# EAGLE board esp (EAGLE 9.6.2)
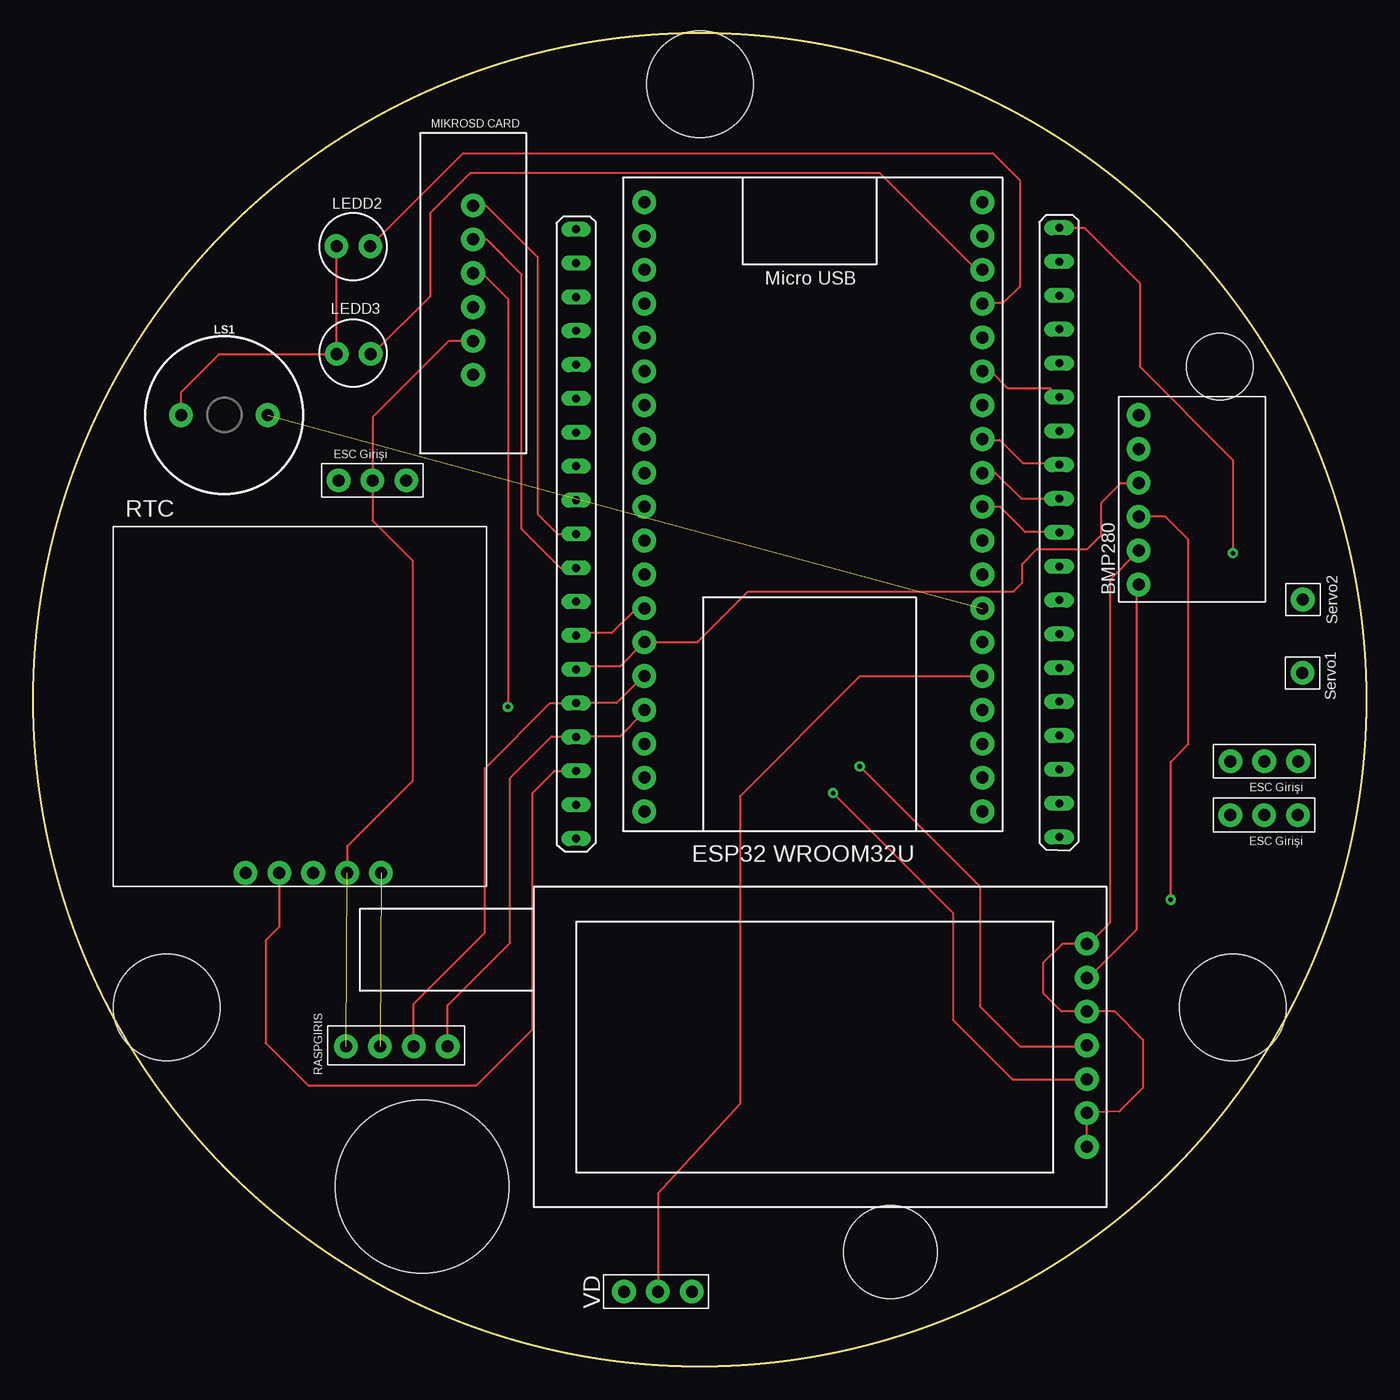
[diagram p0: board, top side]
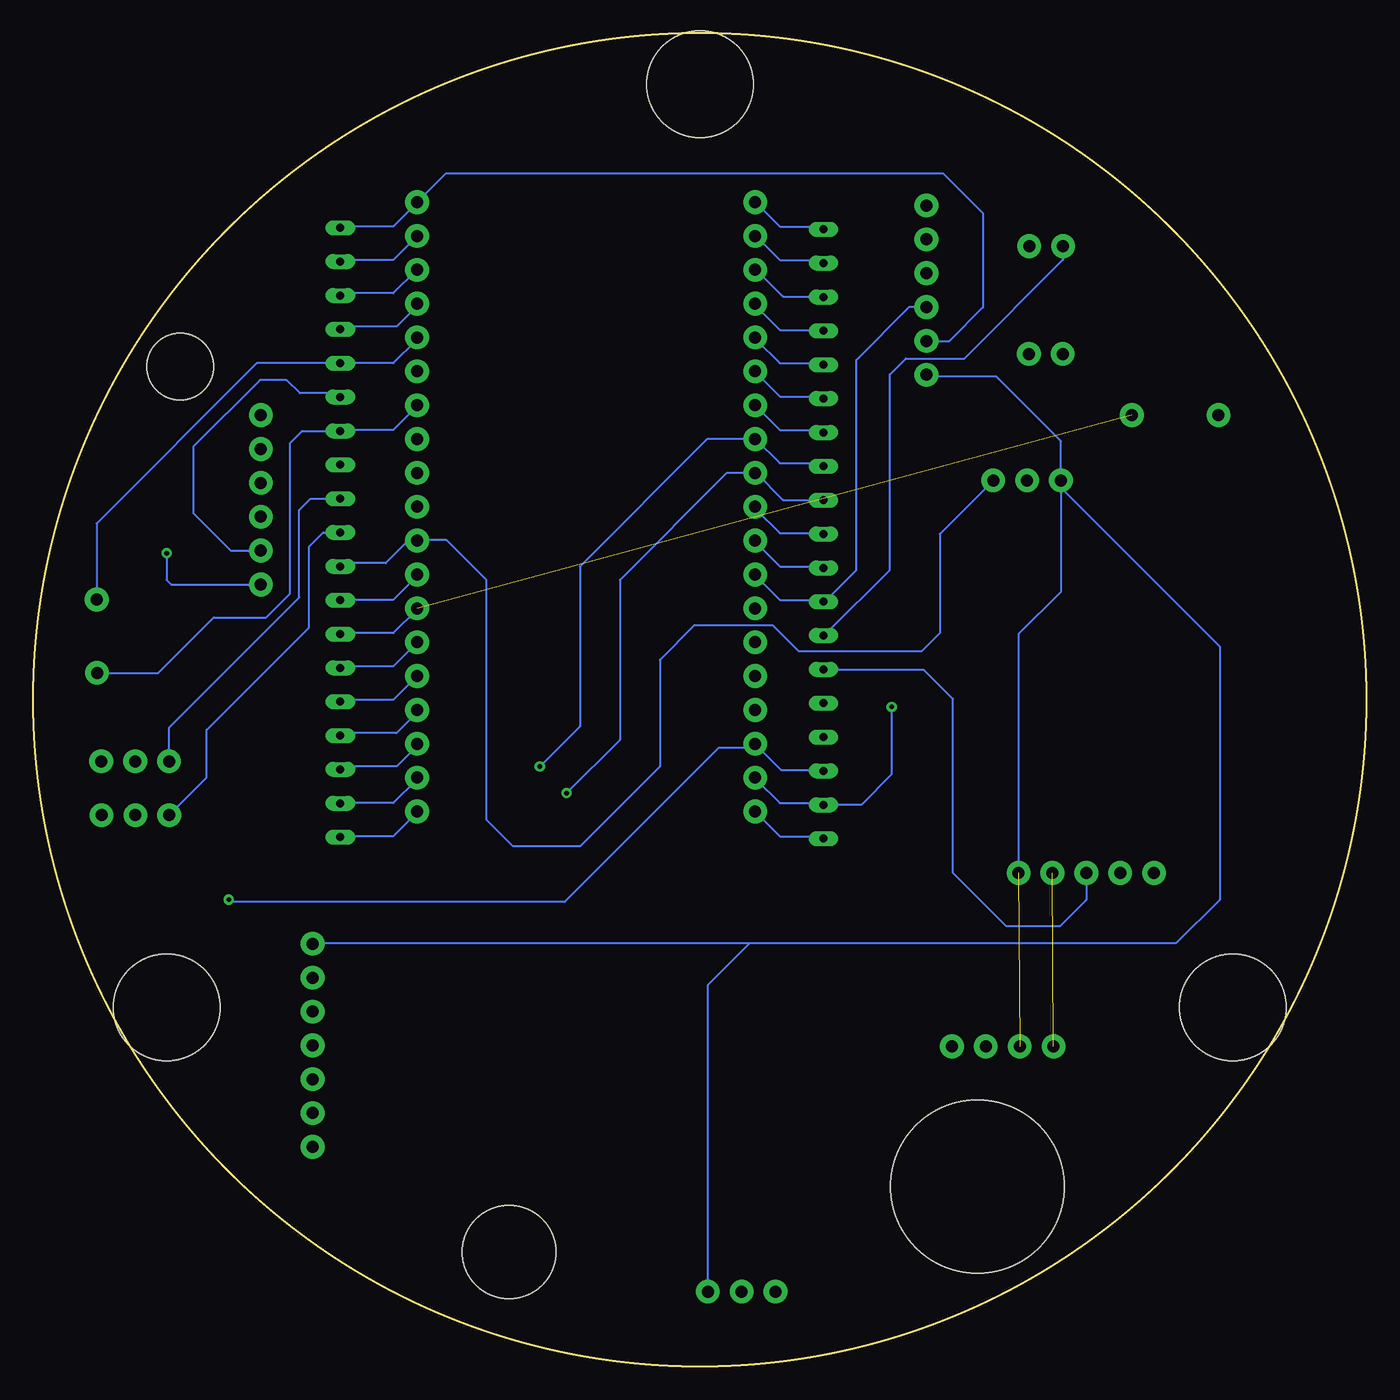
[diagram p1: board, bottom side, seen from below]

Size 100 x 100 mm. Coordinates in mm from the lower left corner, seen from the top.
Outline: circle at 50,50 radius 50
Copper layers (1*16): Top 0.035mm / dielectric 1.5mm / Bottom 0.035mm
Design rules "default": minimum track width 6mil, minimum drill 0.35mm, track to track 6mil, track to pad 6mil, pad to pad 6mil, via to via 6mil, smd to smd 6mil, copper to edge 40mil, drill to drill 6mil, minimum pad ring 10mil, minimum via ring 8mil, stop-mask expansion 4mil, vias tented up to drill 0mil, thermal gap 10mil
Holes 8 mm at 50,96.17 89.98,26.92 10.02,26.92
Holes 13 mm at 29.17,13.48
Holes 5 mm at 89,75
Holes 7 mm at 64.31,8.55

## Footprints (pad centres in the part's own frame; a part is rotated, then mirrored left to right if it is on the bottom)
BMP280 = drill 0.9 pad 1.778: CSB 3.81,3.81; GND -3.81,3.81; SCL -1.27,3.81; SDA 1.27,3.81; SDD 6.35,3.81; VCC -6.35,3.81
BUZZER-12MM = drill 0.9 pad 1.778: + 3.25,0; - -3.25,0
TINYRTC = drill 0.9 pad 1.778: DS -5.08,0; GND 5.08,0; SCL -2.54,0; SDA 0,0; VCC 2.54,0
VOLTAGE_DIVIDER = drill 0.9 pad 1.778: PIN1 0,2.54; PIN2 0,0; PIN3 0,-2.54
RASPGIRIS = drill 0.9 pad 1.778: 5V 0,2.54; GND 0,0; RX 0,-5.08; TX 0,-2.54
ESP32WROOM32U = drill 0.9 pad 1.778: 0 27.9,-30.48; 2 27.9,-33.02; 3V3 2.54,2.54; 4 27.9,-27.94; 5 27.9,-20.32; 5V 2.54,-43.18; 12 2.54,-27.94; 13 2.54,-33.02; 14 2.54,-25.4; 15 27.9,-35.56; 16 27.9,-25.4; 17 27.9,-22.86; 18 27.9,-17.78; 19 27.9,-15.24; 21 27.9,-10.16; 22 27.9,-2.54; 23 27.9,0; 25 2.54,-17.78; 26 2.54,-20.32; 27 2.54,-22.86; 32 2.54,-12.7; 33 2.54,-15.24; 34 2.54,-7.62; 35 2.54,-10.16; CLK 27.9,-43.18; CMD 2.54,-40.64; D0 27.9,-40.64; D1 27.9,-38.1; D2 2.54,-35.56; D3 2.54,-38.1; EN 2.54,0; GND 2.54,-30.48; GND@2 27.9,2.54; GND@3 27.9,-12.7; RX 27.9,-7.62; TX 27.9,-5.08; VN 2.54,-5.08; VP 2.54,-2.54
LORAFULLSIZE = drill 0.9 pad 1.778: AUX -10.51,-3.67; GND -10.51,-8.75; M0 -10.51,6.49; M1 -10.51,3.95; RX -10.51,1.41; TX -10.51,-1.13; VCC -10.51,-6.21
MICROSD_CARD = drill 0.9 pad 1.778: CS 0,5.08; GND 0,-7.62; MISO 0,-2.54; MOSI 0,0; SCK 0,2.54; VCC 0,-5.08
SERVO_SIGNAL = drill 0.9 pad 1.778: SERVO 0,0
ESC_GIRIS = drill 0.9 pad 1.778: 5V 0,0; GND -2.54,0; PWM 2.54,0
ESPSAGPIN = drill 0.6 long: 0 0,0; 2 0,-2.54; 4 0,2.54; 5 0,10.16; 15 0,-5.08; 16 0,5.08; 17 0,7.62; 18 0,12.7; 19 0,15.24; 21 0,20.32; 22 0,27.94; 23 0,30.48; CLK 0,-12.7; D0 0,-10.16; D1 0,-7.62; GND@2 0,33.02; GND@3 0,17.78; RX 0,22.86; TX 0,25.4
ESPSOLPIN = drill 0.6 long: 3V3 0,38.1; 5V 0,-7.62; 12 0,7.62; 13 0,2.54; 14 0,10.16; 25 0,17.78; 26 0,15.24; 27 0,12.7; 32 0,22.86; 33 0,20.32; 34 0,27.94; 35 0,25.4; CMD 0,-5.08; D2 0,0; D3 0,-2.54; EN 0,35.56; GND@1 0,5.08; VN 0,30.48; VP 0,33.02
LED = drill 0.9 pad 1.778: + -2.54,0; - 0,0

## Placement (x,y rotation side)
BMP1  BMP280  [BMP280]  86.74,65 90 top
LS1  BUZZER-PTH  [BUZZER-12MM]  14.33,71.36 0 top
U$1  TINYRTC  [TINYRTC]  21,37 0 top
U$2  VOLTAGE_DIVIDER  [VOLTAGE_DIVIDER]  46.86,5.6 90 top
U$3  RASPGIRIS  [RASPGIRIS]  26,24 90 top
U$4  ESP32WROOM32U  [ESP32WROOM32U]  73.74,44.16 180 top
U$5  LORAFULLSIZE  [LORAFULLSIZE]  68.54,22.94 180 top
U$6  MICROSD_CARD  [MICROSD_CARD]  33,82 0 top
U$7  SERVO_SIGNAL  [SERVO_SIGNAL]  95.22,52.02 0 top
U$9  SERVO_SIGNAL  [SERVO_SIGNAL]  95.25,57.52 0 top
U$11  ESC_GIRIS  [ESC_GIRIS]  25.44,66.46 0 top
U$12  ESC_GIRIS  [ESC_GIRIS]  92.34,41.35 180 top
U$13  ESC_GIRIS  [ESC_GIRIS]  92.36,45.39 180 top
U$14  ESPSAGPIN  [ESPSAGPIN]  40.72,72.6 180 top
U$15  ESPSOLPIN  [ESPSOLPIN]  76.97,77.79 180 top
U$17  LED  [LED]  22.75,84.03 180 top
U$18  LED  [LED]  22.77,75.94 180 top

## Library data of the parts
BMP1 U$2 U$7 U$9 U$11-U$13 = SpatiumB
LS1 = SparkFun-Electromechanical; PROD_ID: COMP-08253; SF_SKU: COM-07950
U$1 U$3-U$6 U$14 U$15 U$17 U$18 = SpatMuy2022

## Nets
3GND: U$4.GND@2 U$14.GND@2
3V3: U$4.3V3 U$15.3V3
5: U$4.5 U$6.CS U$14.5
5GND: BMP1.GND U$1.GND U$2.PIN3 U$3.GND U$4.GND U$5.AUX U$5.GND U$5.M0 U$5.M1 U$6.GND U$11.GND U$15.GND@1
5V: BMP1.VCC U$1.VCC U$3.5V U$4.5V U$5.VCC U$6.VCC U$11.5V U$15.5V
12: U$4.12 U$7.SERVO U$15.12
13: U$4.13 U$9.SERVO U$15.13
16: U$4.16 U$5.TX U$14.16
17: U$4.17 U$5.RX U$14.17
18: U$4.18 U$6.SCK U$14.18
19: U$4.19 U$6.MISO U$14.19
21: BMP1.SDA U$1.SDA U$4.21 U$14.21
22: BMP1.SCL U$1.SCL U$4.22 U$14.22
23: U$4.23 U$6.MOSI U$14.23
25: U$4.25 U$11.PWM U$15.25
26: U$4.26 U$12.PWM U$15.26
27: U$4.27 U$13.PWM U$15.27
34: U$2.PIN2 U$4.34 U$15.34
BGND: LS1.- U$4.GND@3 U$14.GND@3 U$17.- U$18.-
BPWM: LS1.+ U$4.32 U$15.32
D2: U$4.D2 U$15.D2 U$17.+
D3: U$4.D3 U$15.D3 U$18.+
N$3: U$4.EN U$15.EN
N$4: U$4.VP U$15.VP
N$5: U$4.VN U$15.VN
N$7: U$4.35 U$15.35
N$9: U$4.33 U$15.33
N$13: U$4.14 U$15.14
N$19: U$4.CMD U$15.CMD
N$33: U$4.4 U$14.4
N$34: U$4.0 U$14.0
N$35: U$4.2 U$14.2
N$36: U$4.15 U$14.15
N$37: U$4.D1 U$14.D1
N$38: U$4.D0 U$14.D0
N$39: U$4.CLK U$14.CLK
RX: U$3.TX U$4.RX U$14.RX
TX: U$3.RX U$4.TX U$14.TX

## Tracks (layer width: path | path; a pad name or v marks a point on that pad's centre or on a via)
3GND
  Bottom 0.152: U$14.GND@2 40.75,39.75 44,39.75 45.75,41.5 U$4.GND@2
3V3
  Bottom 0.152: U$15.3V3 76.75,39.75 73,39.75 71.25,41.5 U$4.3V3
5
  Top 0.152: U$6.CS 33.97,87.08 37.83,83.21 37.83,64 37.83,63.97 37.83,63.93 39.32,62.44 U$14.5
  Bottom 0.152: U$14.5 40.75,62.5 44,62.5 45.75,64.25 U$4.5
5GND  (1 unrouted)
  Top 0.152: U$5.M0 79,16.5 79,18.75 U$5.M1 81.5,19.11 83.25,20.86 83.25,24.5 81.14,26.61 U$5.AUX 77.14,26.61 75.75,28 75.75,30.25 77.19,31.69 U$5.GND 79.25,31.75 80.75,33.25 80.75,59 82.75,61 BMP1.GND | U$4.GND 71.85,74.64 73.09,73.39 76.29,73.39 U$15.GND@1
  Bottom 0.152: 23,66.25 U$11.GND | U$11.GND 22.9,69.4 27.75,74.25 33,74.25 U$6.GND | 77,72.5 U$15.GND@1 77.26,73 80,73 81,74 83,74 88,69 88,64 85.19,61.19 BMP1.GND | 46.25,31.75 79,31.75 U$5.GND | 46.25,31.75 14.25,31.75 11,35 11,54 22.9,65.9 U$11.GND | U$2.PIN3 49.4,28.6 46.25,31.75 | U$11.GND 22.9,58.1 26.08,54.92 U$1.GND
5V  (via drill 0.35)  (1 unrouted)
  Top 0.152: U$1.VCC 23.54,39 28.44,43.9 28.44,60.46 25.44,63.46 U$11.5V 25.5,66.5 25.5,71.25 31.17,76.92 U$6.VCC | U$5.VCC 79.25,29.25 82.75,32.75 82.75,58.5 82.78,58.5 BMP1.VCC | 77,85.25 U$15.5V 78.86,85.41 83,81.27 83,75 90,68 v90,61
  Bottom 0.152: U$15.5V 76.75,85.5 73,85.5 71.25,87.25 U$4.5V 69.04,89.5 31.75,89.5 28.75,86.5 28.75,79.45 31.28,76.92 U$6.VCC | v90,61 90,59 89.65,58.65 BMP1.VCC
12
  Bottom 0.152: U$4.12 71.25,72 73,70.25 76.75,70.25 U$15.12 79.83,70.17 80.74,69.26 80.74,57.97 82.53,56.19 86.45,56.19 90.62,52.02 U$7.SERVO
13
  Bottom 0.152: U$4.13 71.25,77 73,75.25 U$15.13 83.23,75.25 95.25,63.23 95.25,57.75 U$9.SERVO
16  (via drill 0.35)
  Top 0.152: v62,45 71,36 71,27 74,24 78.98,24 U$5.TX
  Bottom 0.152: U$14.16 40.75,67.75 44,67.75 45.75,69.5 U$4.16 49.44,69.56 59,60 59,48 v62,45
17  (via drill 0.35)
  Top 0.152: v60,43 69,34 69,26 73.47,21.53 U$5.RX
  Bottom 0.152: U$14.17 40.75,65 43.75,65 45.75,67 U$4.17 47.98,67.02 56,59 56,47 v60,43
18
  Top 0.152: U$6.SCK 34,84.54 36.64,81.9 36.64,62.81 39.55,59.9 U$14.18
  Bottom 0.152: U$14.18 40.75,60 44,60 45.75,61.75 U$4.18
19
  Bottom 0.152: U$4.19 45.75,59.25 44,57.5 40.75,57.5 U$14.19 40.5,57.5 38.25,59.75 38.25,75.5 34.29,79.46 U$6.MISO
21
  Top 0.152: U$14.21 40.75,52.5 44,52.5 45.75,54.25 U$4.21 | 46,54.5 U$4.21 | U$4.21 49.84,54.32 53.64,58.12 73.53,58.12 74.2,58.78 74.2,60.2 75.31,61.31 79.08,61.31 80.11,62.34 80.11,64.79 81.6,66.27 BMP1.SDA
  Bottom 0.152: U$14.21 40.5,52.25 33.19,52.25 31,50.06 31,37 27,33 23,33 21,35 U$1.SDA
22  (via drill 0.35)
  Top 0.152: v85.34,35 85.34,45.34 86.67,46.67 86.67,62.01 84.94,63.73 BMP1.SCL | U$1.SCL 18.46,32.97 17.43,31.94 17.43,24.25 20.6,21.07 33.24,21.07 37.45,25.28 37.45,43 39.1,44.66 U$14.22
  Bottom 0.152: U$14.22 40.75,44.75 43.89,44.75 U$4.22 46.13,46.41 48.55,46.41 60.13,34.82 85.34,34.82 v85.34,35
23  (via drill 0.35)
  Top 0.152: U$6.MOSI 33.67,82 35.6,80.07 v35.6,49.46
  Bottom 0.152: U$4.23 45.75,44 44,42.25 40.75,42.25 U$14.23 37.88,42.12 35.6,44.4 v35.6,49.46
25
  Bottom 0.152: U$15.25 76.75,60.25 73.56,60.25 71.88,61.94 U$4.25 71.14,62 69,62 66,59 66,41 64,39 59,39 53,45 53,53 50.42,55.58 44.51,55.58 42.55,53.62 33.38,53.62 32,55 32,62.45 U$11.PWM
26
  Top 0.152: U$4.26 72.51,64.48 74.42,62.57 76.95,62.57 U$15.26
  Bottom 0.152: U$12.PWM 87,44.15 87,47.74 79.31,55.42 79.31,61.49 78.25,62.55 U$15.26
27
  Top 0.152: 71.25,67 U$4.27 72.2,67.02 74.13,65.09 U$15.27
  Bottom 0.152: U$13.PWM 89.82,47.91 80.05,57.68 80.05,64.23 79.19,65.09 U$15.27
34
  Top 0.152: U$2.PIN2 46.86,12.97 53,19.68 53,42.75 62.03,51.78 U$4.34
  Bottom 0.152: U$15.34 76.75,50 73,50 71.25,51.75 U$4.34
BGND
  Top 0.152: U$17.- 22.75,84 22.75,76 U$18.- 13.94,75.94 11.08,73.08 LS1.- | U$4.GND@3 45.24,56.86 43.39,55 40.75,55 U$14.GND@3
  Bottom 0.152: U$17.- 22.75,83 30.14,75.61 34.54,75.61 35.75,74.4 35.75,59.75 40.5,55 U$14.GND@3
BPWM  (1 unrouted)
  Bottom 0.152: U$15.32 76.75,55 73,55 71.25,56.75 U$4.32
D2
  Top 0.152: U$17.+ 32.25,91 72,91 74,89 74,81 72.75,79.75 71.25,79.75 U$4.D2
  Bottom 0.152: U$15.D2 76.75,78 72.75,78 71.25,79.5 U$4.D2
D3
  Top 0.152: U$18.+ 25.5,76 29.75,80.25 29.75,86.5 32.75,89.5 63.5,89.5 70.74,82.26 U$4.D3
  Bottom 0.152: U$15.D3 76.75,80.5 73,80.5 71.25,82.25 U$4.D3
N$3
  Bottom 0.152: U$15.EN 76.75,42.25 73,42.25 71.25,44 U$4.EN
N$4
  Bottom 0.152: U$15.VP 76.75,45 72.75,45 71.25,46.5 U$4.VP
N$5
  Bottom 0.152: U$15.VN 76.75,47.5 72.75,47.5 71.25,49 U$4.VN
N$7
  Bottom 0.152: U$15.35 76.75,52.5 73,52.5 71.25,54.25 U$4.35
N$9
  Bottom 0.152: U$15.33 76.75,57.5 73,57.5 71.25,59.25 U$4.33
N$13
  Top 0.152: U$15.14 76.75,67.75 74.25,67.75 72.5,69.5 71.25,69.5 U$4.14
N$19
  Bottom 0.152: U$15.CMD 76.75,83 73,83 71.25,84.75 U$4.CMD
N$33
  Bottom 0.152: U$14.4 40.75,70.25 44,70.25 45.75,72 U$4.4
N$34
  Bottom 0.152: U$14.0 40.75,72.75 44,72.75 45.75,74.5 U$4.0
N$35
  Bottom 0.152: U$14.2 40.75,75.25 44,75.25 45.75,77 U$4.2
N$36
  Bottom 0.152: U$14.15 40.75,77.75 44,77.75 45.75,79.5 U$4.15
N$37
  Bottom 0.152: U$14.D1 40.75,80.25 43.75,80.25 45.75,82.25 U$4.D1
N$38
  Bottom 0.152: U$14.D0 40.75,83 44,83 45.75,84.75 U$4.D0
N$39
  Bottom 0.152: U$14.CLK 40.75,85.5 44,85.5 45.75,87.25 U$4.CLK
RX
  Top 0.152: 40.75,49.75 43.75,49.75 45.75,51.75 U$4.RX | 40.75,49.75 U$14.RX | U$3.TX 28.54,27.2 33.88,32.54 33.88,44.86 38.77,49.75 40.75,49.75
TX
  Top 0.152: 40.75,47.25 44,47.25 45.75,49 U$4.TX | 40.75,47.25 U$14.TX | U$3.RX 31.08,27.08 35.77,31.77 35.77,44.13 38.89,47.25 40.75,47.25

## Text on the board
tNames: LEDD2 | LEDD3 | Servo2 | Servo1